# EAGLE board AS5048 Encoder (EAGLE 7.6.0)
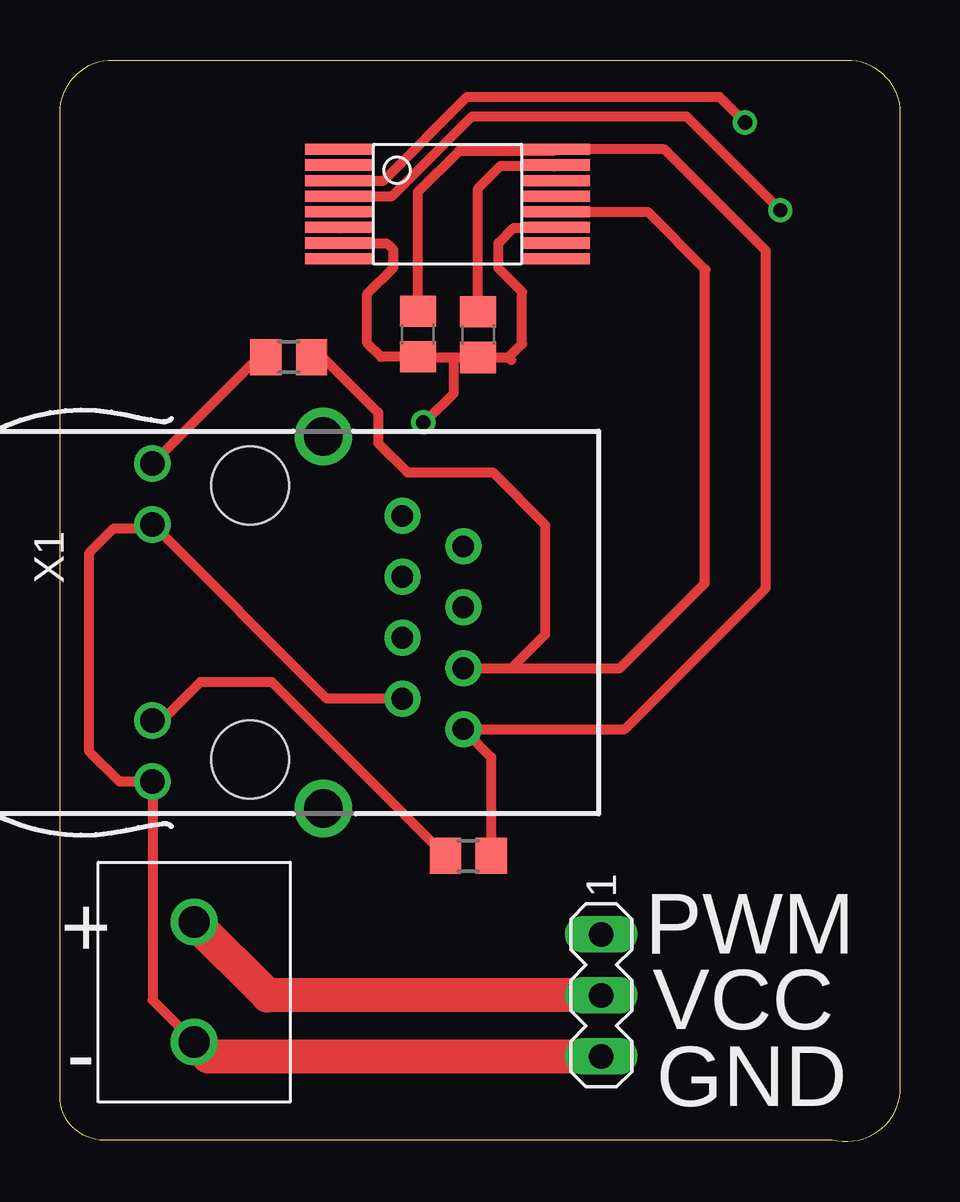
[diagram p0: board, top side]
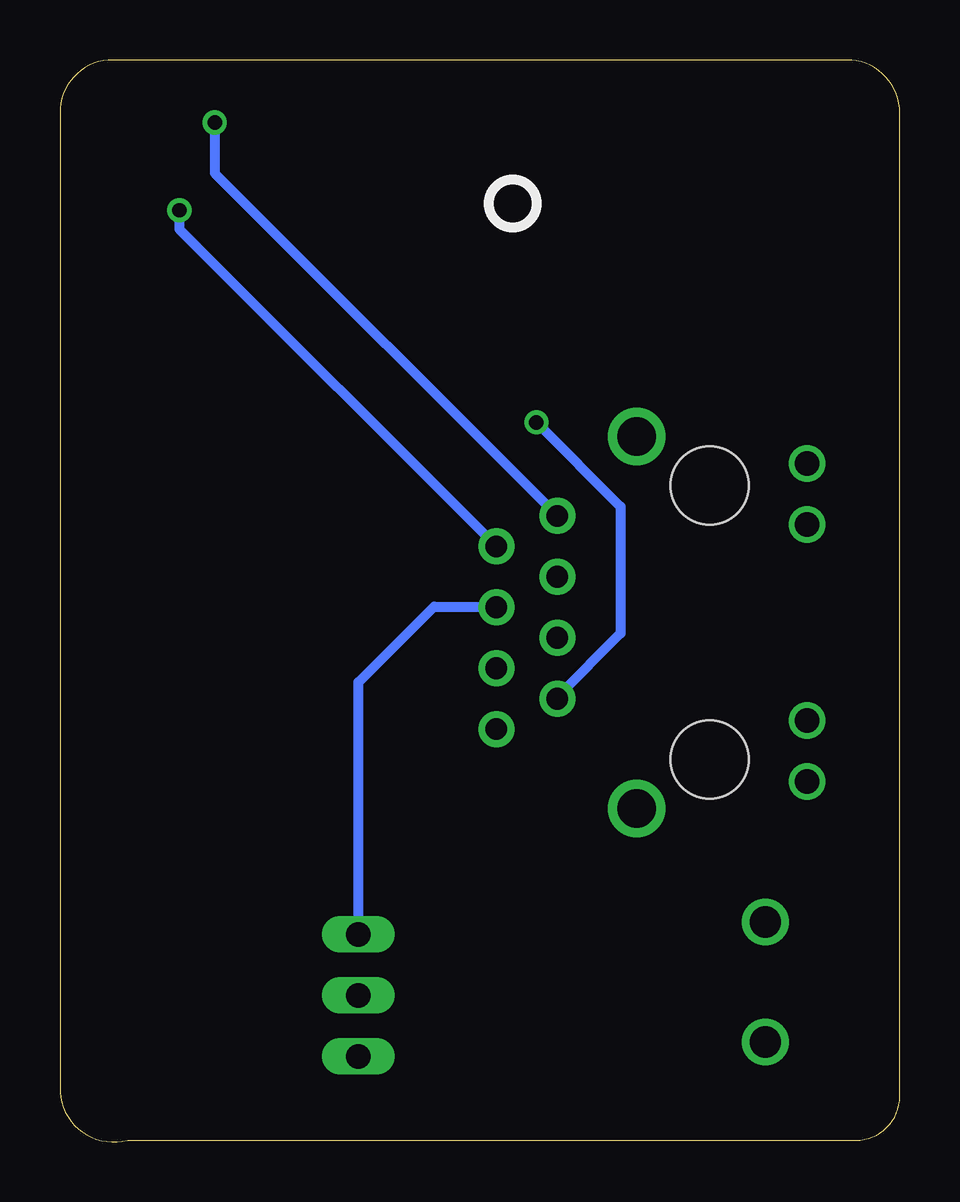
[diagram p1: board, bottom side, seen from below]

Size 35.01 x 45.08 mm. Coordinates in mm from the lower left corner, seen from the top.
Outline: 32.19,0.08 2.01,0.08 arc-101 0.01,2.08 0.01,43.08 arc-79 2.01,45.08 33.01,45.08 arc-79 35.01,43.08 35.01,2.08 arc-101 32.19,0.08
Copper layers (1*16): Top 0.035mm / dielectric 1.5mm / Bottom 0.035mm
Design rules "default": minimum track width 10mil, minimum drill 24mil, track to track 8mil, track to pad 8mil, pad to pad 8mil, via to via 8mil, smd to smd 8mil, copper to edge 40mil, drill to drill 8mil, minimum pad ring 10mil, minimum via ring 8mil, stop-mask expansion 4mil, vias tented up to drill 0mil, thermal gap 10mil

## Footprints (pad centres in the part's own frame; a part is rotated, then mirrored left to right if it is on the bottom)
C0805 = smd 1.3 x 1.5: 1 -0.95,0; 2 0.95,0
R0805 = smd 1.3 x 1.5: 1 -0.95,0; 2 0.95,0
MA03-1 = drill 1.016 long: 1 -2.54,0; 2 0,0; 3 2.54,0
TERMINALBLOCK277-1667-ND = drill 1.3: 1 -2.5,0; 2 2.5,0
SSOP16 = smd 2.86 x 0.46: 1 -4.51,2.275; 2 -4.51,1.625; 3 -4.51,0.975; 4 -4.51,0.325; 5 -4.51,-0.325; 6 -4.51,-0.975; 7 -4.51,-1.625; 8 -4.51,-2.275; 9 4.51,-2.275; 10 4.51,-1.625; 11 4.51,-0.975; 12 4.51,-0.325; 13 4.51,0.325; 14 4.51,0.975; 15 4.51,1.625; 16 4.51,2.275
SI-50170 = drill 0.9 pad 1.5: 1 4.445,5.842; 2 3.175,3.302; 3 1.905,5.842; 4 0.635,3.302; 5 -0.635,5.842; 6 -1.905,3.302; 7 -3.175,5.842; 8 -4.445,3.302 | drill 1.016 pad 1.5: A1 -6.63,-7.118; A2 4.09,-7.118; C1 -4.09,-7.118; C2 6.63,-7.118 | drill 1.6 pad 2.2: S1 -7.747,0; S2 7.747,0 | hole 3.251: -5.715,-3.048; 5.715,-3.048

## Placement (x,y rotation side)
C1  100nF  [C0805]  14.92,33.66 270 top
C2  10uF  [C0805]  17.43,33.64 270 top
R1  270  [R0805]  9.53,32.7 0 top
R2  270  [R0805]  17.03,11.92 0 top
SV1  [MA03-1]  22.56,6.1 270 top
U$1  TERMINALBLOCK277-1667-ND  [TERMINALBLOCK277-1667-ND]  5.6,6.66 90 top
U$2  AS5145  [SSOP16]  16.16,39.08 0 top
X1  SI-50170  [SI-50170]  10.97,21.64 270 top

## Library data of the parts
C1 C2 = eagle-ltspice; SPICEMODEL: NONE; SPICEPREFIX: C
R1 R2 = eagle-ltspice; SPICEMODEL: NONE; SPICEPREFIX: R
SV1 = con-lstb; OC_FARNELL: unknown; OC_NEWARK: unknown
U$1 U$2 = makesmith
X1 = con-stewart; OC_FARNELL: unknown; OC_NEWARK: unknown

## Nets
3V3: C2.1 U$2.15
GND: C1.2 C2.2 SV1.3 U$1.1 U$2.7 U$2.11 X1.2 X1.C1 X1.C2
LED1: R1.1 X1.A1
LED2: R2.1 X1.A2
MODE_INDEX: U$2.6
N$3: U$2.10
N$4: U$2.9
PWM: R1.2 U$2.12 X1.3
PWR: SV1.2 U$1.2
SERVO: SV1.1 X1.5
SIG_A: U$2.3 X1.8
SIG_B: U$2.4 X1.7
VCC: C1.1 R2.2 U$2.16 X1.1

## Tracks (layer width: path | path; a pad name or v marks a point on that pad's centre or on a via)
3V3
  Top 0.406: 20.61,40.65 U$2.15 20.64,40.67 18.37,40.67 17.43,39.73 C2.1
GND  (via drill 0.6)
  Top 0.406: 16.42,32.68 14.94,32.68 C1.2 13.38,32.71 12.81,33.28 12.81,35.34 13.9,36.43 13.9,37.17 13.65,37.42 11.68,37.42 U$2.7 | 16.42,32.68 C2.2 18.69,32.68 | 18.69,32.68 19.26,33.25 19.26,35.41 18.27,36.4 18.27,37.44 18.91,38.08 20.65,38.08 U$2.11 | 18.69,32.68 18.81,32.57 | 16.42,32.68 16.42,31.2 15.2,29.98 v15.15,29.98 | X1.2 11.12,18.46 X1.C1 3.68,25.56 2.24,25.56 1.23,24.54 1.23,16.26 2.48,15.01 X1.C2 3.86,5.9 6.2,3.56
  Top 1.422: U$1.1 6.2,3.56 SV1.3
  Bottom 0.406: v15.15,29.98 11.64,26.47 11.64,21.19 14.28,18.55 X1.2
LED1
  Top 0.406: X1.A1 8.28,32.69 R1.1
LED2
  Top 0.406: R2.1 8.84,19.16 5.85,19.16 4.24,17.55 X1.A2
MODE_INDEX
  Top 0.406: U$2.6 11.7,38.05
PWM
  Top 0.406: U$2.12 24.51,38.75 26.91,36.35 26.88,36.31 26.88,23.27 23.34,19.73 18.82,19.73 | X1.3 18.82,19.73 | 18.82,19.73 20.23,21.14 20.23,25.71 18.04,27.89 14.49,27.89 13.27,29.11 13.27,30.38 10.96,32.69 R1.2
PWR
  Top 1.422: SV1.2 8.66,6.1 U$1.2
SERVO
  Bottom 0.406: SV1.1 22.56,19.16 19.41,22.31 16.85,22.31 X1.5
SIG_A  (via drill 0.6)
  Top 0.406: U$2.3 13.49,40.05 16.98,43.54 27.49,43.54 v28.56,42.47
  Bottom 0.406: v28.56,42.47 28.56,40.37 X1.8
SIG_B  (via drill 0.6)
  Top 0.406: U$2.4 13.85,39.4 17.18,42.73 26.12,42.73 v30.03,38.82
  Bottom 0.406: v30.03,38.82 30.03,38.03 X1.7
VCC
  Top 0.406: 20.65,41.33 U$2.16 | C1.1 14.92,39.58 16.65,41.31 20.62,41.31 U$2.16 | U$2.16 25.21,41.36 29.42,37.14 29.42,23.07 23.55,17.19 X1.1 17.98,16.03 R2.2

## Text on the board
tPlace: + | PWM | VCC | - | GND